# Altium PCB PCB1.PcbDoc
Units mil, origin at the board's own origin, x right, y up, seen from the top; angles counter-clockwise.
Board outline 2637.8 x 3852.11 mil, 4 copper layers (Top Layer, +5V, GND, Bottom Layer), stack 30.634 mil thick; 83 components, 53 nets, 285 pads, 159 vias.
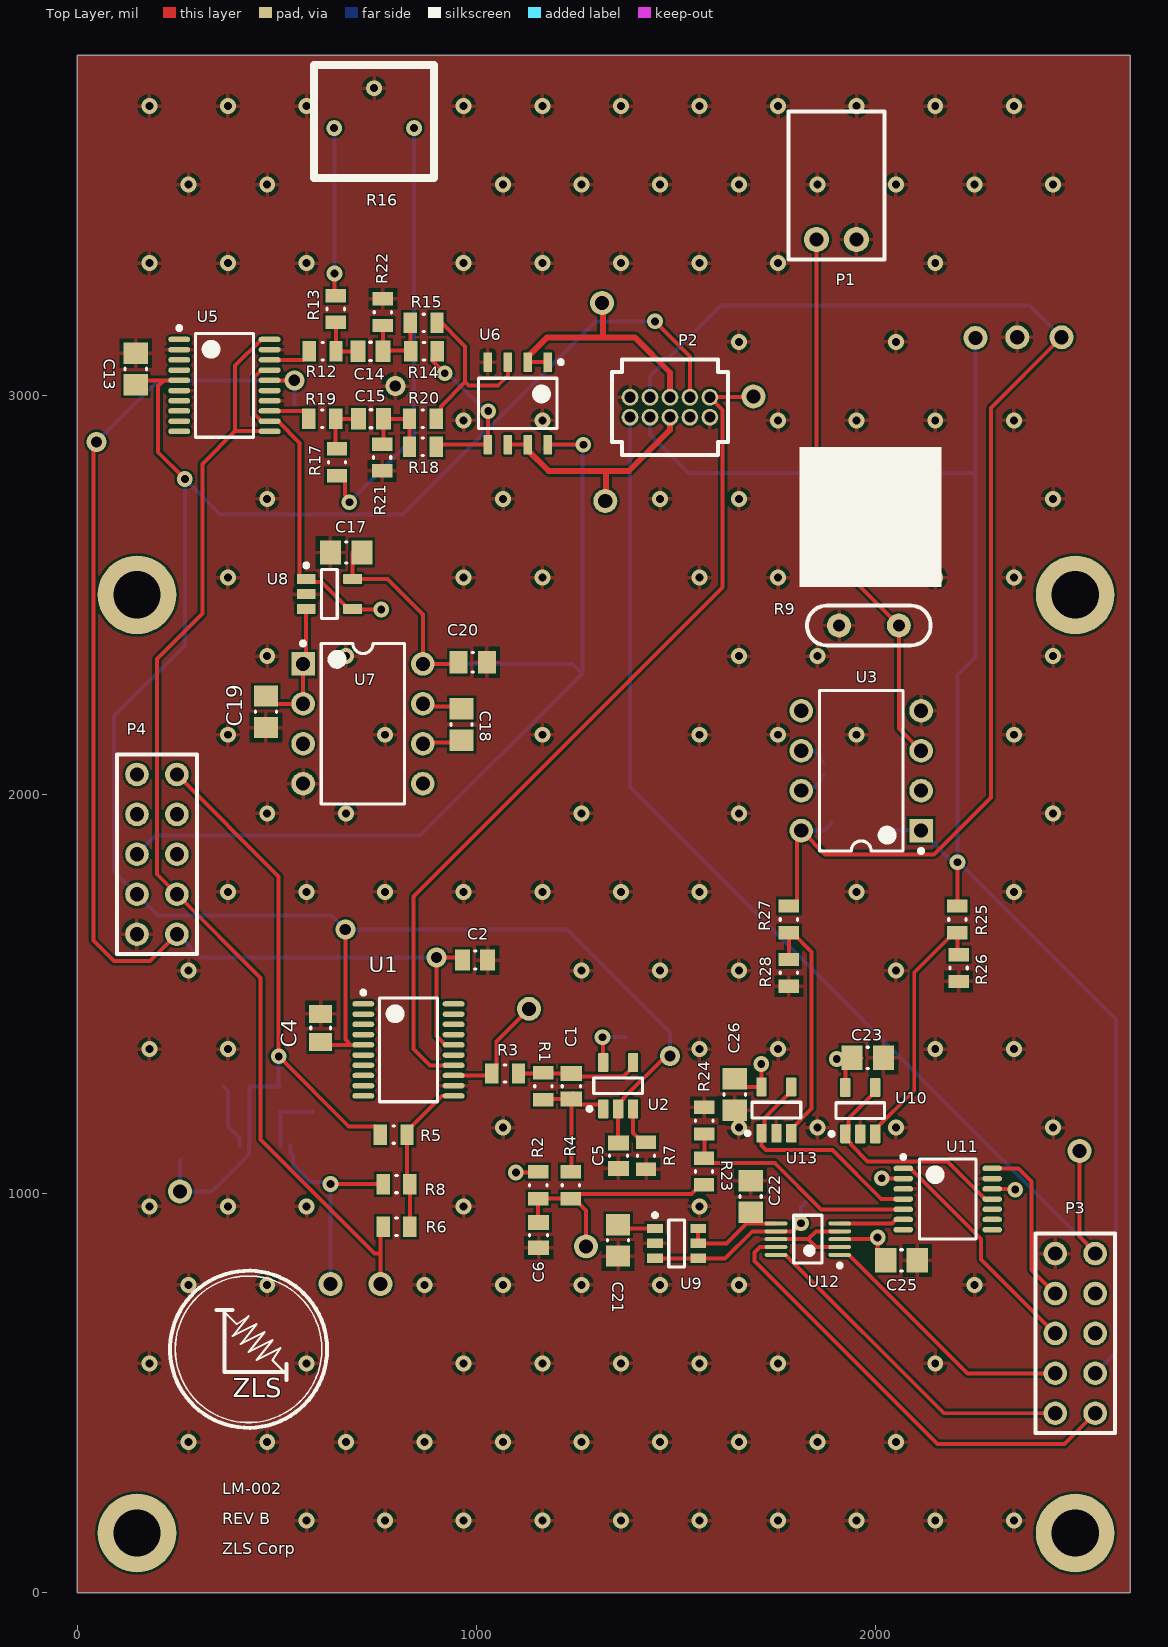
[diagram p0: Top Layer view]
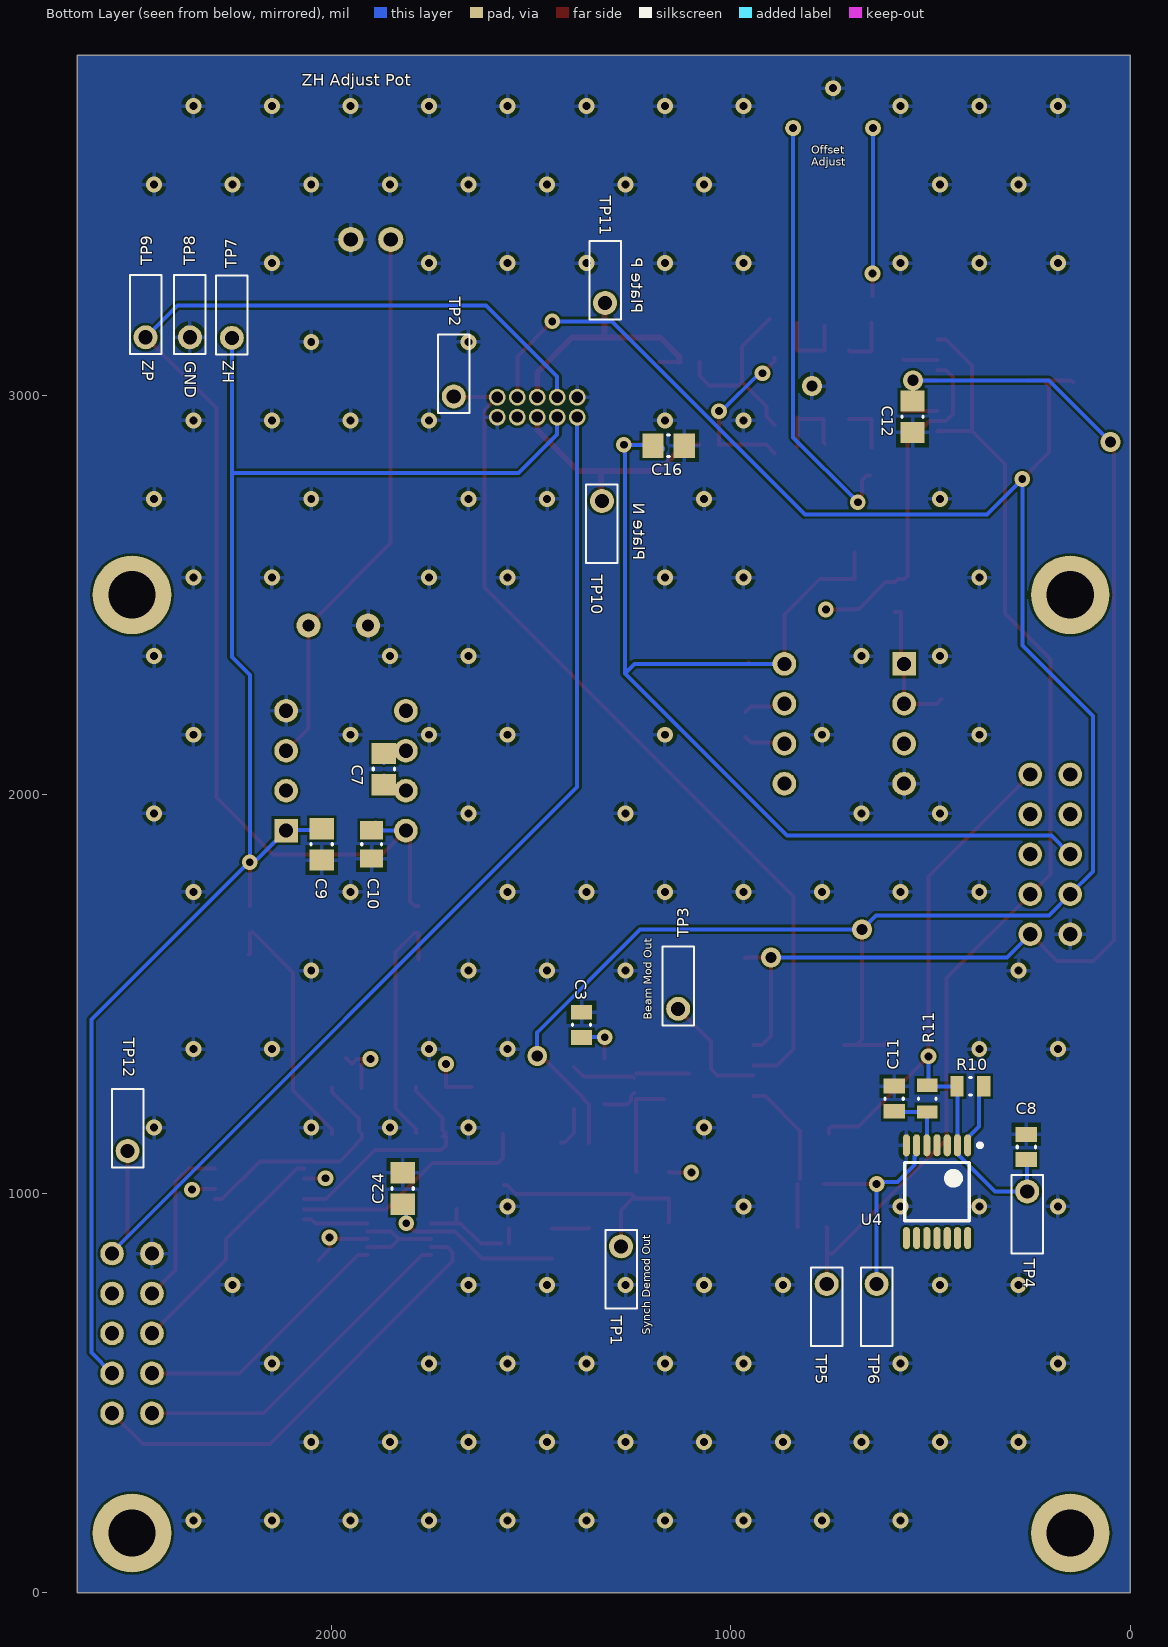
[diagram p1: Bottom Layer view, seen from below]
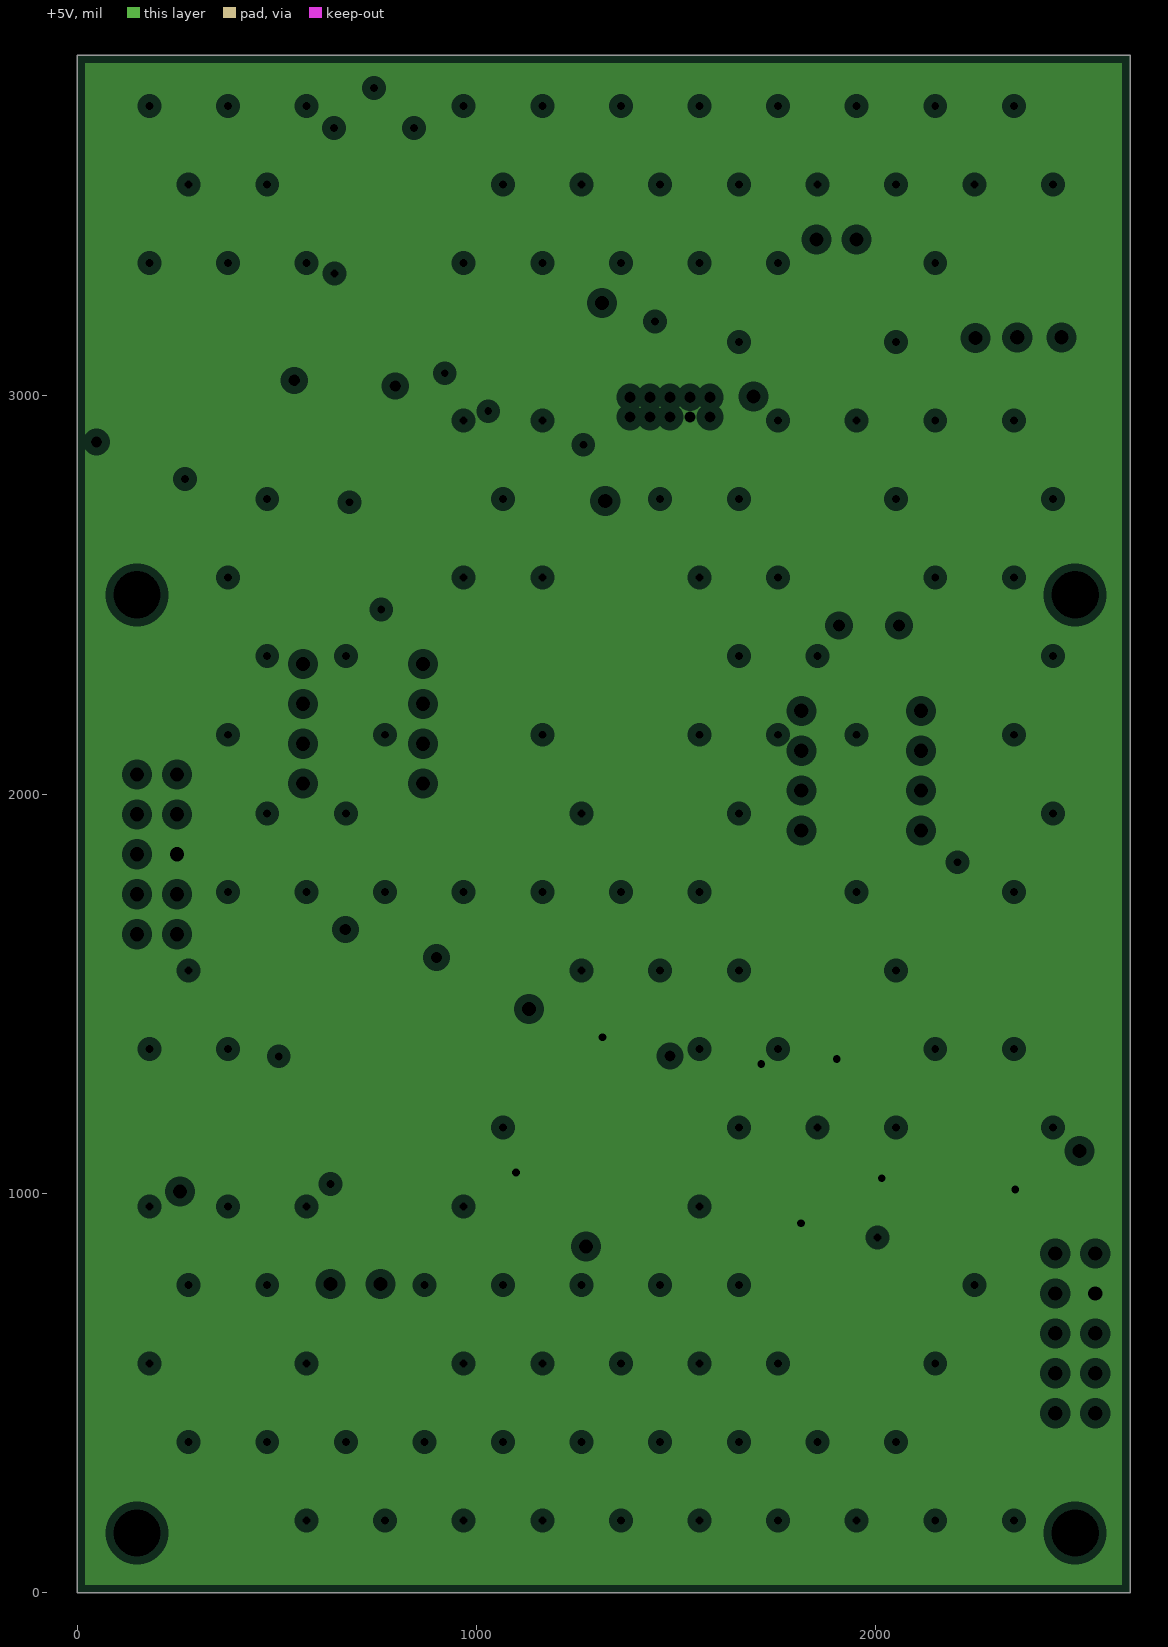
[diagram p2: +5V, clearances drawn from the general rule]
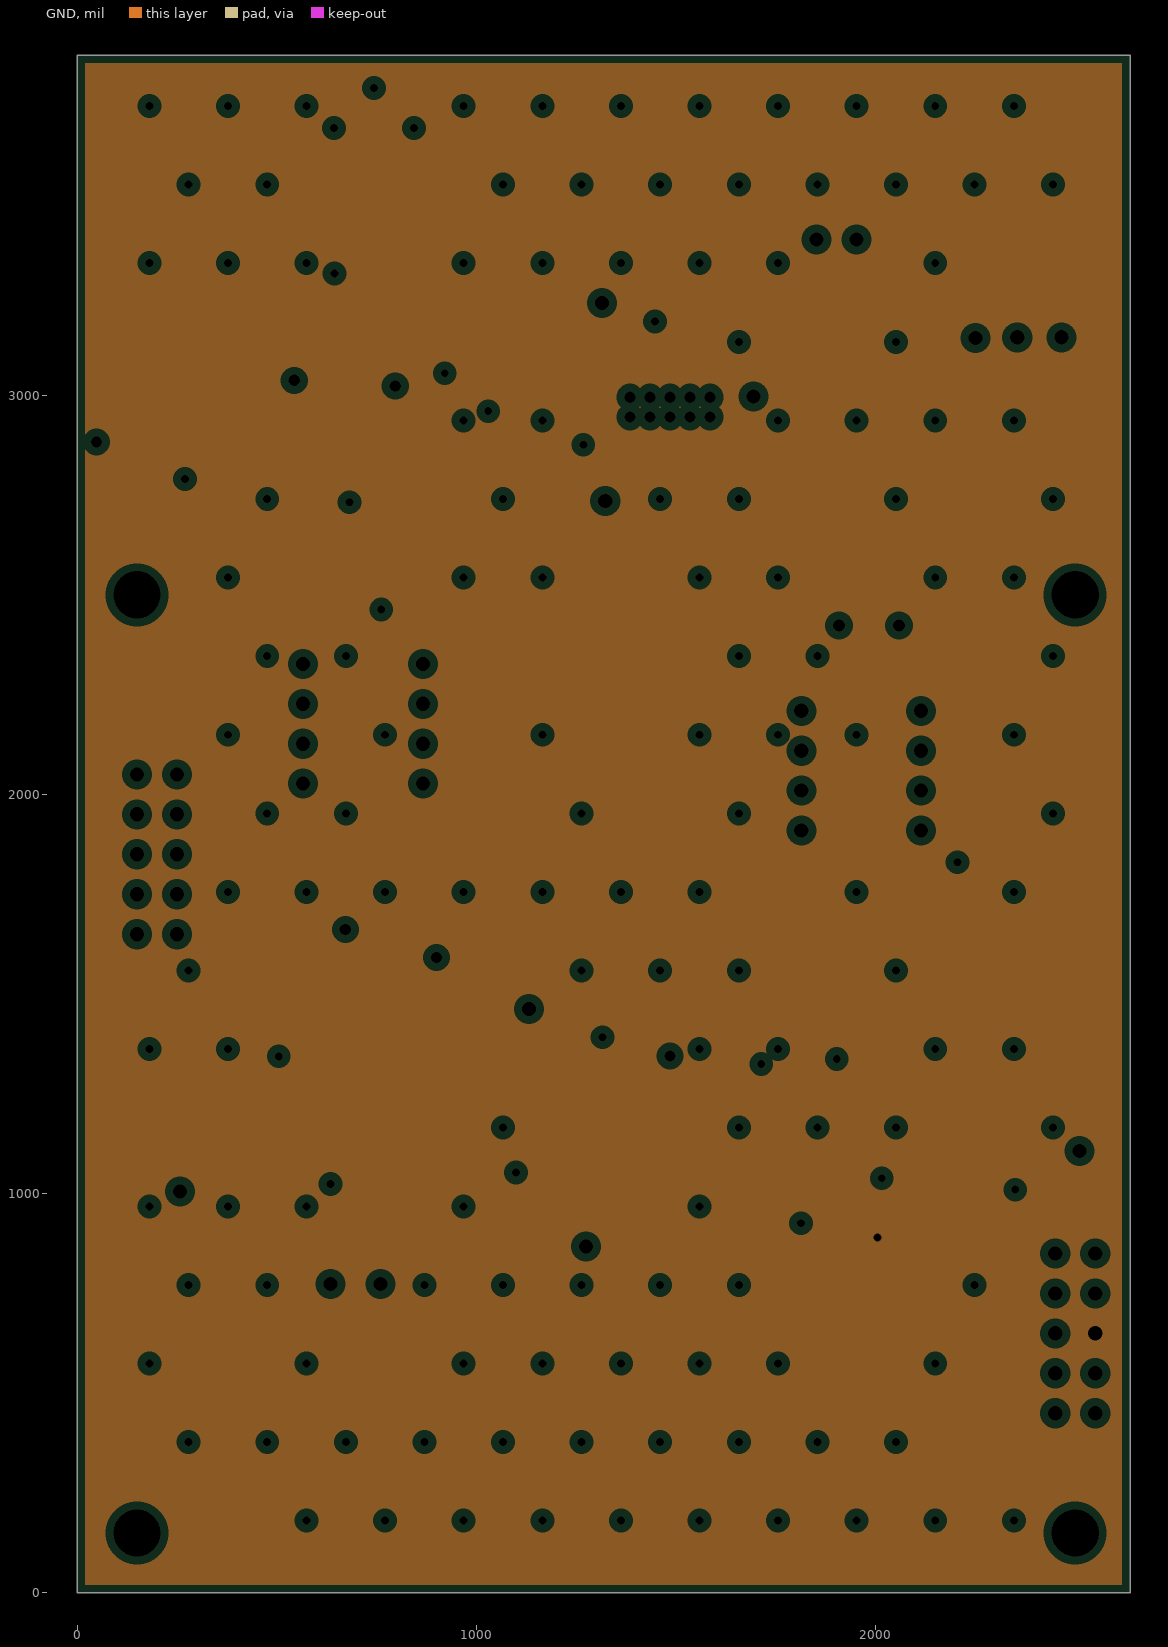
[diagram p3: GND, clearances drawn from the general rule]

## Layer stack, top to bottom
Top Solder: solder mask 0.4, Solder Resist, Dk 3.5
Top Layer: signal copper 1.4
Dielectric 1: core 10, FR-4, Dk 4.2
+5V: plane copper 1.417, net +5
Dielectric 4: prepreg 5, Dk 4.2
GND: plane copper 1.417, net +3.3
Dielectric 3: core 10, Dk 4.2
Bottom Layer: signal copper 1.4
Bottom Solder: solder mask 0.4, Solder Resist, Dk 3.5

## Board outline
0,0 2637.8,0 2637.79,3852.11 0,3852.11

## Design rules (kind name [scope] priority, off if disabled: settings)
Clearance [All] p1: gap=5.91 ignorepadtopadclearanceinfootprint=TRUE except(1.57: SMDPad-SMDPad; 3.94: SMDPad-THPad)
DiffPairsRouting DiffPair_DiffPairsRouting [InDifferentialPair ('PLATE')] p1: maxlimit=10 minlimit=10 mostfreqgap=10 toplayer_minwidth=15 toplayer_maxwidth=15 toplayer_prefwidth=15 bottomlayer_minwidth=15 bottomlayer_maxwidth=15 bottomlayer_prefwidth=15 maxuncoupledlength=500
DiffPairsRouting [All] p2: maxlimit=10 minlimit=10 mostfreqgap=10 toplayer_minwidth=15 toplayer_maxwidth=15 toplayer_prefwidth=15 bottomlayer_minwidth=15 bottomlayer_maxwidth=15 bottomlayer_prefwidth=15 maxuncoupledlength=500
HoleSize [All] p1: absolutevalues=TRUE maxlimit=393.7 minlimit=2.99 maxpercent=80.000 minpercent=20.000
HoleToHoleClearance [All] p1: gap=4.72 allowstackedmicrovias=TRUE
MatchedLengths DiffPair_MatchedLengths [InDifferentialPair ('PLATE')] p1: tolerance=100 checknetsindiffpair=FALSE checkdiffpairvsdiffpair=TRUE checkxsignals=TRUE checkothers=TRUE
MinimumSolderMaskSliver [All] p1: minsoldermaskwidth=0.98
PlaneClearance [All] p1: clearance=20
PlaneConnect [All] p1: planeconnectstyle=Relief reliefexpansion=20 reliefentries=4 reliefconductorwidth=10 reliefairgap=10
PolygonConnect [All] p1: connectstyle=Relief reliefconductorwidth=10 reliefentries=4 polygonreliefangle="90 Angle" airgapwidth=10
RoutingVias [All] p1: holewidth=28 width=50 viastyle="Through Hole" minholewidth=5 minwidth=35.43 maxholewidth=55.12 maxwidth=100
SilkToSilkClearance [All] p1: silktosilkclearance=4.72
SilkToSolderMaskClearance [IsPad] p1: minsilkscreentomaskgap=4.72 clearancetoexposedcopper=TRUE
SolderMaskExpansion [All] p1: expansion=4
Width [All] p1: maxlimit=10 minlimit=3.94 preferedwidth=10
22 further rules are at their usual default settings.

## Classes and differential pairs
component class Sheet2: C21 C22 C23 C24 C25 C26 R23 R24 R25 R26 R27 R28 U9 U10 U11 U12 U13
component class Sheet1: 19.685mil C1 C2 C3 C4 C5 C6 C7 C8 C9 C10 C11 C12 C13 C14 C15 C16 C17 C18 C19 C20 P1 P2 P3 P4 R1 R2 R3 R4 R5 R6 R7 R8 R9 R10 R11 R12 R13 R14 R15 R16 R17 R18 R19 R20 R21 R22 TP1 TP2 TP3 TP4 TP5 TP6 TP7 TP8 TP9 TP10 TP11 TP12 U1 U2 U3 U4 U5 U6 U7 U8
differential pair PLATE: +PLATE_P -PLATE_N

## Components (designator, comment, footprint, x,y, rotation, side; value= is the part's Value field where it differs from the comment)
C1 "470nF" CAPC0805(2012)75_L 1238.11,1269.11 r270 top value=.47uF
C2 ".1uF" CAPC0805(2012)75_L 997.11,1585.11 r180 top
C3 ".1uF" CAPC0805(2012)75_L 1374.11,1423.11 r90 bottom
C4 "CAP CER 0.1UF 25V X7R 0805" CAPC0805(2012)145_N 610.11,1415.11 r90 top
C5 ".1uF" CAPC0805(2012)75_L 1356.11,1095.11 r270 top
C6 "22uF" CAPC0805(2012)75_L 1156.11,896.11 r90 top
C7 ".1uF" CAPC0805(2012)75_M 1869.13,2063.57 r90 bottom
C8 ".001uF" CAPC0805(2012)75_L 260.11,1117.11 r270 bottom
C9 ".1uF" CAPC0805(2012)75_M 2025,1875 r90 bottom
C10 "Multilayer Ceramic Capacitors MLCC - SMD/SMT 0.01uF 50volts 10% X7R" CAPC0805(2012)145_N 1900,1875 r270 bottom
C11 "470Pf" CAPC0805(2012)75_L 591.11,1238.11 r270 bottom
C12 ".1uF" CAPC0805(2012)75_M 545.11,2946.11 r90 bottom
C13 ".1uF" CAPC0805(2012)75_M 147.11,3065.91 r270 top
C14 "CAP CER 1UF 25V X7R 0805" CAPC0805(2012)155_L 735.11,3110.11 r180 top
C15 "CAP CER 1UF 25V X7R 0805" CAPC0805(2012)155_L 736.11,2941.11 r180 top
C16 ".1uF" CAPC0805(2012)75_M 1156.13,2873.57 r0 bottom
C17 ".1uF" CAPC0805(2012)75_M 674.11,2606.11 r0 top
C18 ".1uF" CAPC0805(2012)75_M 963.11,2175.11 r270 top
C19 ".1uF" CAPC0805(2012)75_M 473.11,2207.11 r90 top
C20 "Multilayer Ceramic Capacitors MLCC - SMD/SMT 0.01uF 50volts 10% X7R" CAPC0805(2012)145_N 991.11,2331.11 r0 top
C21 ".1uF" CAPC0805(2012)75_M 1355.11,883.11 r270 top
C22 ".1uF" CAPC0805(2012)75_M 1687.11,993.11 r270 top
C23 ".1uF" CAPC0805(2012)75_M 1980.36,1340.11 r180 top
C24 ".1uF" CAPC0805(2012)75_M 1822.11,1013.11 r270 bottom
C25 ".1uF" CAPC0805(2012)75_M 2065.11,833.11 r180 top
C26 ".1uF" CAPC0805(2012)75_M 1647.39,1248.57 r90 top
P1 "SSW-102-02-G-S-RA" SSW-102-02-G-S-RA 1952.11,3390.11 r180 top
P2 "FTSH-105-01-F-DV-K" FTSH-105-01-XXX-D-K 1485.11,2970.11 r180 top
P3 "TLW-105-05-G-D" TLW-105-05-G-D 2450.11,850.11 r270 top
P4 "TLW-105-05-G-D" TLW-105-05-G-D 150.11,2050.11 r270 top
R1 "3..k" RESC0805(2012)_L 1168.11,1269.11 r90 top value=300k
R2 "100k" RESC0805(2012)_L 1155.11,1021.11 r90 top
R3 "18.2k" RESC0805(2012)_L 1072.11,1301.11 r180 top
R4 "511k" RESC0805(2012)_L 1237.11,1021.11 r90 top
R5 "0" RESC0805(2012)_L 793.11,1148.11 r0 top
R6 "DNP" RESC0805(2012)_L 800.11,917.11 r0 top value=0
R7 "33k" RESC0805(2012)_L 1425.11,1095.11 r90 top
R8 "DNP" RESC0805(2012)_L 800.11,1024.11 r0 top value=0
R9 "TBD" VH102K 2058.34,2423.26 r180 top
R10 "43.2K" RESC0805(2012)_L 400.11,1269.11 r0 bottom
R11 "10K" RESC0805(2012)_L 508.11,1238.11 r90 bottom
R12 "3.9k" RESC0805(2012)_L 615.11,3110.11 r180 top
R13 "7.5k" RESC0805(2012)_L 648.11,3216.11 r270 top
R14 "0" RESC0805(2012)_L 869.11,3110.11 r180 top
R15 "DNP" RESC0805(2012)_L 868.11,3181.11 r180 top value=0
R16 "TRIMMER 5K OHM 0.25W PC PIN" "TRIMMER 2.54" 644.11,3669.11 r0 top
R17 "7.5k" RESC0805(2012)_L 651.11,2832.11 r270 top
R18 "DNP" RESC0805(2012)_L 866.11,2871.11 r180 top value=0
R19 "3.9k" RESC0805(2012)_L 614.11,2941.09 r0 top
R20 "0" RESC0805(2012)_L 866.11,2941.09 r180 top
R21 "1M" RESC0805(2012)_L 764.11,2844.11 r90 top
R22 "1M" RESC0805(2012)_L 766.11,3208.11 r270 top
R23 "10k" RESC0805(2012)_L 1570.36,1055.64 r270 top
R24 "10k" RESC0805(2012)_L 1571.11,1183.11 r270 top
R25 "100k" RESC0805(2012)_L 2205.11,1687.11 r90 top
R26 "10k" RESC0805(2012)_L 2208.11,1565.11 r90 top
R27 "100k" RESC0805(2012)_L 1783.11,1687.11 r90 top
R28 "10k" RESC0805(2012)_L 1783.11,1553.11 r90 top
TP1 "TP-TH-C-152-H90" TP-TH-C-152-H90 1275.11,868.11 r270 bottom
TP2 "TP-TH-C-152-H90" TP-TH-C-152-H90 1694.11,2997.11 r90 bottom
TP3 "TP-TH-C-152-H90" TP-TH-C-152-H90 1132.11,1463.11 r90 bottom
TP4 "TP-TH-C-152-H90" TP-TH-C-152-H90 257.76,1005.86 r270 bottom
TP5 "TP-TH-C-152-H90" TP-TH-C-152-H90 760.11,774.11 r270 bottom
TP6 "TP-TH-C-152-H90" TP-TH-C-152-H90 634.91,774.11 r270 bottom
TP7 "TP-TH-C-152-H90" TP-TH-C-152-H90 2250.11,3143.81 r90 bottom
TP8 "TP-TH-C-152-H90" TP-TH-C-152-H90 2355.11,3145.11 r90 bottom
TP9 "TP-TH-C-152-H90" TP-TH-C-152-H90 2466.11,3145.11 r90 bottom
TP10 "TP-TH-C-152-H90" TP-TH-C-152-H90 1323.11,2735.11 r270 bottom
TP11 "TP-TH-C-152-H90" TP-TH-C-152-H90 1315.11,3231.11 r90 bottom
TP12 "TP-TH-C-152-H90" TP-TH-C-152-H90 2511.11,1107.11 r90 bottom
U1 "MAX333CWP+" TSOP65P640X90-20N 830.11,1360.11 r0 top
U2 "OPA188AIDBVR" DBV0005A_M 1355.39,1270.57 r90 top
U3 "AD584KNZ" ADI-N-8 1964.13,2059.57 r180 top
U4 "MC14584BDTR2G" MC14584BDTR2G 483.7,1005.11 r270 bottom
U5 "MAX333CWP+" TSOP65P640X90-20N 369.13,3024.57 r0 top
U6 "OPA2188AIDR" D0008A_L 1104.13,2979.57 r270 top
U7 "AD584KNZ" ADI-N-8 716.11,2177.11 r0 top
U8 "OPA188AIDBVR" DBV0005A_M 632.11,2502.11 r0 top
U9 "MAX6070AAUT41+T" SOT95P280X445-6N 1501.71,875.39 r0 top
U10 "OPA188AIDBVR" DBV0005A_M 1961.79,1208 r90 top
U11 "ADG1204YRUZ-REEL7" ADI-RU-14_L 2180.84,986.61 r0 top
U12 "MAX11100EUB+T" U10+2_L 1830.57,886.14 r180 top
U13 "OPA188AIDBVR" DBV0005A_M 1751.62,1209.57 r90 top

## Footprints (in the part's own frame and the unit in brackets; to place one, negate y for a bottom-side part, rotate by r counter-clockwise, add the part's x,y. Pads: shape width x height; smd on the part's side, far side on the other; paste and mask are expansions set on the pad)
ADI-N-8 [mm] "DIP, 8-Leads, Body 9.59x6.6mm, Pitch 2.54mm"
  rect 1.5x1.5 hole 0.9: 1(-3.81,3.81)
  round 1.5 hole 0.9: 2(-3.81,1.27) 3(-3.81,-1.27) 4(-3.81,-3.81) 5(3.81,-3.81) 6(3.81,-1.27) 7(3.81,1.27) 8(3.81,3.81)
  silkscreen extent -3.94,-5.1 2.65,5.23, body extent -3.95,-5.07 3.95,5.07, height 5.33
ADI-RU-14_L [mm] "SOP, 14-Leads, Body 5x4.4mm, Pitch 0.65mm, IPC High Density"
  oval 1.25x0.35 smd: 1(-2.825,1.95) 2(-2.825,1.3) 3(-2.825,0.65) 4(-2.825,0) 5(-2.825,-0.65) 6(-2.825,-1.3) 7(-2.825,-1.95) 8(2.825,-1.95) 9(2.825,-1.3) 10(2.825,-0.65) 11(2.825,0) 12(2.825,0.65) 13(2.825,1.3) 14(2.825,1.95)
  silkscreen extent -2.95,-2.55 1.8,2.8, body extent -2.25,-2.55 2.25,2.55, height 1.2
CAPC0805(2012)75_L [mm] "Chip Capacitor, Body 2.0x1.2mm, Height 0.75mm, IPC High Density"
  rect 0.95x1.35 smd: 1(-0.8,0) 2(0.8,0)
  silkscreen extent -0.05,-0.58 0.05,0.58, body extent -1.1,-0.72 1.1,0.72, height 0.75
CAPC0805(2012)75_M [mm] "Chip Capacitor, Body 2.0x1.2mm, Height 0.75mm, IPC Low Density"
  rect 1.35x1.55 smd: 1(-1,0) 2(1,0)
  silkscreen extent -0.05,-0.67 0.05,0.67, body extent -1.1,-0.72 1.1,0.72, height 0.75
CAPC0805(2012)145_N [mm] "Chip Capacitor, Body 2.0x1.2mm, Height 1.45mm, IPC Medium Density"
  rect 1.15x1.45 smd: 1(-0.9,0) 2(0.9,0)
  silkscreen extent -0.05,-0.62 0.05,0.62, body extent -1.1,-0.72 1.1,0.73, height 1.45
CAPC0805(2012)155_L [mm] "Chip Capacitor, Body 2.0x1.2mm, Height 1.55mm, IPC High Density"
  rect 0.95x1.35 smd: 1(-0.8,0) 2(0.8,0)
  silkscreen extent -0.05,-0.57 0.05,0.57, body extent -1.1,-0.72 1.1,0.72, height 1.55
D0008A_L [mm] "SOIC, 8-Leads, Body 5x4mm, Pitch 1.27mm, IPC High Density"
  rrect18% 1.25x0.55 smd: 1(-2.625,1.905) 2(-2.625,0.635) 3(-2.625,-0.635) 4(-2.625,-1.905) 5(2.625,-1.905) 6(2.625,-0.635) 7(2.625,0.635) 8(2.625,1.905)
  silkscreen extent -2.75,-2.5 1.6,2.86, body extent -3,-2.45 3,2.45, height 1.63
DBV0005A_M [mm] "SOT23, 5-Leads, Body 3.05x1.75mm, Pitch 0.95mm, IPC Low Density"
  rrect15% 1.2x0.65 smd: 1(-1.475,0.95) 2(-1.475,0) 3(-1.475,-0.95) 4(1.475,-0.95) 5(1.475,0.95)
  silkscreen extent -1.6,-1.55 0.5,1.95, body extent -1.42,-1.46 1.42,1.46, height 1.08
FTSH-105-01-XXX-D-K [mil]
  round 42 hole 28 mask+3: 1(-100,-25) 2(-100,25) 3(-50,-25) 4(-50,25) 5(0,-25) 6(0,25) 7(50,-25) 8(50,25) 9(100,-25) 10(100,25)
  silkscreen extent -145,-120 145,120
MC14584BDTR2G [mm]
  oval 1.4x0.45 smd: 1(-2.95,1.95) 2(-2.95,1.3) 3(-2.95,0.65) 4(-2.95,0) 5(-2.95,-0.65) 6(-2.95,-1.3) 7(-2.95,-1.95) 8(2.95,-1.95) 9(2.95,-1.3) 10(2.95,-0.65) 11(2.95,0) 12(2.95,0.65) 13(2.95,1.3) 14(2.95,1.95)
  silkscreen extent -3.07,-2.05 1.85,2.85, body extent -3.2,-2.07 3.2,2.07, height 1.2
RESC0805(2012)_L [mm] "Chip Resistor, Body 2.0x1.3mm, IPC High Density"
  rect 0.85x1.3 smd: 1(-0.85,0) 2(0.85,0)
  silkscreen extent -0.05,-0.55 0.05,0.55, body extent -1.1,-0.67 1.1,0.68, height 0.7
SOT95P280X445-6N [mm] "SOT23, 6-Leads, Body 2.90x2.80mm, Pitch 0.95mm, IPC Medium Density"
  rect 1x0.6 smd: 1(-1.375,0.95) 2(-1.375,0) 3(-1.375,-0.95) 4(1.375,-0.95) 5(1.375,0) 6(1.375,0.95)
  silkscreen extent -1.5,-1.5 0.5,1.92, body extent -1.5,-1.5 1.5,1.5, height 4.45
SSW-102-02-G-S-RA [mm]
  round 1.6 hole 0.91: 1(0,0) 2(2.54,0)
  silkscreen extent -1.78,-8.13 4.32,1.27, body extent -1.52,-8.06 4.06,0.44, height 3.21
TLW-105-05-G-D [mm]
  round 1.5 hole 0.91: 1(0,0) 2(0,2.54) 3(2.54,0) 4(2.54,2.54) 5(5.08,0) 6(5.08,2.54) 7(7.62,0) 8(7.62,2.54) 9(10.16,0) 10(10.16,2.54)
  silkscreen extent -1.27,-1.27 11.43,3.81, body extent -1.27,-1.31 11.43,3.72, height 6.35
TP-TH-C-152-H90 [mil] "Test Point, Through Hole, Hole Size 0.9mm, PCB Mount with Silkscreen Box"
  round 60 hole 35.43: 1(0,0)
  silkscreen extent -41,-39 156,39
"TRIMMER 2.54" [mil]
  round 40 hole 20: 1(0,0) 2(100,100) 3(200,0)
  silkscreen extent -50,-125 250,158, body extent -60,-126 260,200, height 175
TSOP65P640X90-20N [mm] "TSOP, 20-Leads, Body 6.50x4.40mm, Pitch 0.65mm, IPC Medium Density"
  oval 1.4x0.35 smd: 1(-2.875,2.925) 2(-2.875,2.275) 3(-2.875,1.625) 4(-2.875,0.975) 5(-2.875,0.325) 6(-2.875,-0.325) 7(-2.875,-0.975) 8(-2.875,-1.625) 9(-2.875,-2.275) 10(-2.875,-2.925) 11(2.875,-2.925) 12(2.875,-2.275) 13(2.875,-1.625) 14(2.875,-0.975) 15(2.875,-0.325) 16(2.875,0.325) 17(2.875,0.975) 18(2.875,1.625) 19(2.875,2.275) 20(2.875,2.925)
  silkscreen extent -3,-3.3 1.85,3.77, body extent -2.25,-3.3 2.25,3.3, height 0.9
U10+2_L [mm] "TSSOP, 10-Leads, Body 3x3mm, Pitch 0.5mm, IPC High Density"
  oval 1.45x0.25 smd: 1(-2.025,1) 2(-2.025,0.5) 3(-2.025,0) 4(-2.025,-0.5) 5(-2.025,-1) 6(2.025,-1) 7(2.025,-0.5) 8(2.025,0) 9(2.025,0.5) 10(2.025,1)
  silkscreen extent -2.15,-1.53 0.9,1.8, body extent -1.55,-1.55 1.55,1.55, height 1.1
VH102K [mil] "Hermetically Sealed High Precision Resistor"
  round 60 hole 30: 1(0,0) 2(149.61,0)
  silkscreen extent -80,-50 230,50

## Part data
C1 C2 C3 C5 C6 C8 C11: library part CMP-1036-02117-1, "CAP 150pF 16V ±10% 0805 (2012 Metric) Thickness 0.75mm SMD", Case-EIA=0805, Case-Metric=2012, Rated Voltage="16 V", Tolerance=±10%, Max Thickness="0.75 mm", Technology=SMT
C4: library part CMP-1036-04795-1, Capacitance=0.1µF, Manufacturer="Murata Electronics North America", Manufacturer Part Number=GRM21BR71E104KA01L, Operating Temperature="-55°C ~ 125°C", Package / Case="0805 (2012 Metric)", Ratings=-, Supplier Part Number 1=490-1673-6-ND, Temperature Coefficient=X7R, Tolerance=±10%, Voltage - Rated=25V, Applications="General Purpose", Category=Capacitors, ComponentLink1Description=http://www.murata.com/~/media/webrenewal/support/library/catalog/products/capacitor/mlcc/c02e.ashx, ComponentLink1URL=http://www.murata.com/~/media/webrenewal/support/library/catalog/products/capacitor/mlcc/c02e.ashx, Features=-, Height - Seated (Max)=-, Lead Spacing=-, Lead Style=-, Mounting Type="Surface Mount, MLCC", Packaging=Digi-Reel®, Part Status=Active, Pricing 1="1=0.2, 10=0.145, 100=0.0683, 500=0.04788, 1000=0.03964 (USD)", RoHS="RoHS Compliant", Size / Dimension="0.079\" L x 0.049\" W (2.00mm x 1.25mm)", Stock 1=891652, Supplier 1=Digi-Key, Thickness (Max)="0.053\" (1.35mm)"
C7 C9 C12 C13 C16 C17 C18 C19 C21 C22 C23 C24 C25 C26: library part CMP-1036-01414-1, "CAP 33pF 25V ±2% 0805 (2012 Metric) Thickness 0.75mm SMD", Case-EIA=0805, Case-Metric=2012, Rated Voltage="25 V", Tolerance=±2%, Max Thickness="0.75 mm", Technology=SMT
C10 C20: library part CMP-1036-04795-1, Capacitance=10nF, Case/Package=0805, Case Code (Metric)=2012, Dielectric=X7R, Dielectric Material=Ceramic, Manufacturer=Kemet, Manufacturer Part Number=C0805C103K5RACAUTO, Max Operating Temperature=125°C, Min Operating Temperature=-55°C, Package Quantity=1, Supplier Part Number 1=399-6924-1-ND, Tolerance=10%, Voltage Rating=50V, Case Code (Imperial)=0805, ComponentLink1Description=https://datasheet.ciiva.com/22700/1693454-22700519.pdf, ComponentLink1URL=https://datasheet.ciiva.com/22700/1693454-22700519.pdf, ComponentLink2Description=https://datasheet.ciiva.com/7842/1693454-7842175.pdf, ComponentLink2URL=https://datasheet.ciiva.com/7842/1693454-7842175.pdf, Contact Plating=Tin, Depth=1.25mm, Height=0.78mm, Length=2mm, Mount="Surface Mount", Packaging="Tape and Reel", Pricing 1="1=0.12, 10=0.087, 100=0.041, 500=0.0287, 1000=0.0238 (USD)", Radiation Hardening=No, REACH SVHC="No SVHC", Stock 1=63236, Supplier 1=Digi-Key, Termination=SMD/SMT, Thickness=0.035inch, Voltage Rating (DC)=50V, Width=0.049inch
C14 C15: library part CMP-1036-04882-1, Capacitance=1µF, Manufacturer="Murata Electronics North America", Manufacturer Part Number=GRM21BR71E105KA99L, Operating Temperature="-55°C ~ 125°C", Package / Case="0805 (2012 Metric)", Ratings=-, Supplier Part Number 1=490-6484-6-ND, Temperature Coefficient=X7R, Tolerance=±10%, Voltage - Rated=25V, Applications="General Purpose", Category=Capacitors, ComponentLink1Description=http://www.murata.com/~/media/webrenewal/support/library/catalog/products/capacitor/mlcc/c02e.ashx, ComponentLink1URL=http://www.murata.com/~/media/webrenewal/support/library/catalog/products/capacitor/mlcc/c02e.ashx, Features=-, Height - Seated (Max)=-, Lead Spacing=-, Lead Style=-, Mounting Type="Surface Mount, MLCC", Packaging=Digi-Reel®, Part Status=Active, Pricing 1="1=0.14, 10=0.099, 100=0.0468, 500=0.0328, 1000=0.02715 (USD)", RoHS="RoHS Compliant", Size / Dimension="0.079\" L x 0.049\" W (2.00mm x 1.25mm)", Stock 1=295074, Supplier 1=Digi-Key, Thickness (Max)="0.053\" (1.35mm)"
P1: Supplier Part Number 1=SAM1225-02-ND, Supplier 1=Digi-Key
P2: library part FTSH-105-01-XXX-D-K, "TERMINAL STRIP, .050\"(1.27mm) PITCH, 10 PINS, KEYING OPTION.", Manufacturer=SAMTEC, CREATED="September 26, 2016 - Wendy Xin", PCB DECAL=FTSH-105-01-F-DV-K
P3 P4: Current Rating="5.2A per Contact", Insulation Color=Black, Manufacturer="Samtec Inc.", Manufacturer Part Number=MTLW-105-05-G-D-170, Material Flammability Rating="UL94 V-0", Operating Temperature="-55°C ~ 125°C", Supplier Part Number 1=MTLW-105-05-G-D-170-ND, Voltage Rating=-, Applications=-, Category="Connectors, Interconnects", ComponentLink1Description=http://suddendocs.samtec.com/prints/mtlw-1xx-xx-xx-x-xxx-xx-xx-mkt1.pdf, ComponentLink1URL=http://suddendocs.samtec.com/prints/mtlw-1xx-xx-xx-x-xxx-xx-xx-mkt1.pdf, Connector Type=Header, Contact Finish - Mating=Gold, Contact Finish - Post=Gold, Contact Finish Thickness - Mating="10µin (0.25µm)", Contact Finish Thickness - Post="3µin (0.08µm)", Contact Length - Mating="0.170\" (4.32mm)", Contact Length - Post="0.105\" (2.67mm)", Contact Material="Phosphor Bronze", Contact Shape=Square, Contact Type="Male Pin", Fastening Type=Push-Pull, Features=-, Ingress Protection=-, Insulation Height="0.060\" (1.52mm)", Insulation Material="Liquid Crystal Polymer (LCP)", Mated Stacking Heights=-, Mounting Type="Through Hole", Number of Positions=10, Number of Positions Loaded=All, Number of Rows=2, Overall Contact Length="0.335\" (8.51mm)", Packaging=Tube, Part Status=Active, Pitch - Mating="0.100\" (2.54mm)", Pricing 1="1=1.79 (USD)", RoHS="RoHS Compliant", Row Spacing - Mating="0.100\" (2.54mm)", Shrouding=Unshrouded, Stock 1=0, Style="Board to Board or Cable", Supplier 1=Digi-Key, Termination=Solder
R1 R2 R3 R4 R5 R6 R7 R8 R10 R11 R12 R13 R14 R15 R17 R18 R19 R20 R21 R22 R23 R24 R25 R26 R27 R28: library part CMP-1013-00215-1, "2R55 0.125W 1% 0805 (2012 Metric)  SMD", Case-EIA=0805, Case-Metric=2012, Power="0.125 W", Tolerance="1 %", Technology=SMT
R9: library part CMP-1013-00393-1
R16: library part Trimmer, Manufacturer="Vishay Foil Resistors (Division of Vishay Precision Group)", Manufacturer Part Number=Y00535K00000J0L, Power (Watts)="0.25W, 1/4W", Resistance (Ohms)=5k, Resistive Material="Metal Foil", Supplier Part Number 1=804-1020-ND, Temperature Coefficient=±10ppm/°C, Tolerance=±5%, Adjustment Type="Side Adjustment", Category="Potentiometers, Variable Resistors", ComponentLink1Description=http://www.vishaypg.com/docs/63053/1240.pdf, ComponentLink1URL=http://www.vishaypg.com/docs/63053/1240.pdf, Mounting Type="Through Hole", Number of Turns=21, Packaging=Bulk, Part Status=Active, Pricing 1="1=34.42, 10=32.265, 25=26.5292, 50=22.944, 100=22.227, 250=20.793, 500=19.2156 (USD)", RoHS="RoHS Compliant", Size / Dimension="Rectangular - 0.250\" x 0.175\" Face x 0.250\" L (6.35mm x 4.45mm x 6.35mm)", Stock 1=679, Supplier 1=Digi-Key, Termination Style="PC Pins"
TP1 TP2 TP3 TP4 TP5 TP6 TP7 TP8 TP9 TP10 TP11 TP12: library part CMP-0484-00003-2, "Test Point, Through Hole, Hole Size 0.9 mm, PCB Mount with Silkscreen Box", Manufacturer="No Vendor", PartNumber=TP-TH-C-152-H90
U1 U5: "IC SWITCH QUAD SPDT 20TSSOP", Case/Package=TSSOP, Dual Supply Voltage=15V, Manufacturer=Maxim, Manufacturer Part Number=MAX333AEUP+, Max Dual Supply Voltage=20V, Max Operating Temperature=85°C, Max Power Dissipation=559mW, Max Supply Current=250uA, Max Supply Voltage=30V, Min Dual Supply Voltage=4.5V, Min Operating Temperature=-40°C, Min Supply Voltage=10V, On-State Resistance=35R, Operating Supply Current=1uA, Package Quantity=74, Supplier Part Number 1=700-MAX333AEUP, ComponentLink1Description=https://datasheet.ciiva.com/2978/max333a-2978850.pdf, ComponentLink1URL=https://datasheet.ciiva.com/2978/max333a-2978850.pdf, ComponentLink2Description=https://datasheet.ciiva.com/30478/0900766b81253c85-30478260.pdf, ComponentLink2URL=https://datasheet.ciiva.com/30478/0900766b81253c85-30478260.pdf, ComponentLink3Description=https://datasheet.ciiva.com/1674/max333a-1674617.pdf, ComponentLink3URL=https://datasheet.ciiva.com/1674/max333a-1674617.pdf, ComponentLink4Description=https://datasheet.ciiva.com/26825/max333aeup-26825546.pdf, ComponentLink4URL=https://datasheet.ciiva.com/26825/max333aeup-26825546.pdf, Height=0.95mm, Lead Free="Lead Free", Length=6.6mm, Number of Bits=4, Number of Channels=4, Number of Pins=20, Packaging=Rail/Tube, Pricing 1="1=6.77, 10=6.43, 50=5.8, 100=5.8, 1000=5.62, 10000=5.62 (USD)", Radiation Hardening=No, REACH SVHC=Unknown, Stock 1=664, Supplier 1=Mouser, Supply Type=Single,Dual, Throw Configuration=SPDT, Turn-Off Delay Time=145ns, Turn-On Delay Time=175ns, Weight=0.006737oz, Width=4.5mm
U2 U8 U10 U13: library part CMP-0809-00005-2, "Precision, Low Noise, Rail-to-Rail Output, Zero-Drift Operational Amplifier, 4 to 36 V, -40 to 125 degC, 5-pin SOT23 (DBV5), Green (RoHS & no Sb/Br)", Manufacturer="Texas Instruments", Rating=Catalog, Total Supply Voltage(Max)(+5V is 5, +/-5V is 10)=36, Total Supply Voltage(Min)(+5V is 5, +/-5V is 10)=4, CMRR(Min)(dB)=120, Code_JEDEC=MO-178, ComponentLink1Description="Manufacturer URL", ComponentLink1URL=http://www.ti.com/, ComponentLink2Description=Datasheet, ComponentLink2URL=http://www.ti.com/lit/ds/symlink/opa188.pdf, ComponentLink3Description="Package Specification", ComponentLink3URL=http://www.ti.com/litv/pdf/mpds018i, DatasheetVersion=SBOS642A, Eco-Plan="Green (RoHS & no Sb/Br)", GBW(Typ)(MHz)=2, Iq per channel(Max)(mA)=0.51, Mounting Technology="Surface Mount", Number of Channels=1, Offset Drift(Typ)(uV/C)=0.03, PackageDescription="5-Pin Plastic Small Outline, Body 1.6 x 2.9 mm, Pitch 0.95 mm", PackageReference=DBV0005A, PackageVersion="4073253-4/K, 03/2006", PartNumber=OPA188AIDBVR, Slew Rate(Typ)(V/us)=0.8, SubFamily="Zero Drift Precision Amplifier"
U3 U7: library part CMP-0784-00054-1, "Pin Programmable, Precision Voltage Reference, + 2.5 / + 5 / + 7.5 / + 10 Prog V Output, 4.5 to 30 V Supply, Commercial, 8-pin DIP (N-8), Tube", Manufacturer="Analog Devices", Operating Temp Range="0 to 70 degC", Code_JEDEC=MS-001, ComponentLink1Description="Manufacturer URL", ComponentLink1URL=http://www.analog.com/en/index.html, ComponentLink2Description=Datasheet, ComponentLink2URL=http://www.analog.com/static/imported-files/data_sheets/AD584.pdf, ComponentLink3Description="Package Specification", ComponentLink3URL=http:/www.analog.com/static/imported-files/packages/PKG_PDF/PDIP(N)/N_8.pdf, ComponentLink4Description="URL Link1", ComponentLink4URL="Product URL:http://www.analog.com/en/special-linear-functions/voltage-references/ad584/products/product.html", DatasheetVersion="Rev. C", Max V Supply (V)=30, Min V Supply (V)=4.5, Mounting Technology="Through Hole", PackageDescription="8-Pin Plastic Dual In-Line Package, Row spacing 7.62 mm, Pitch 2.54 mm", PackageReference=N-8, PackageVersion="070606-A, 07/2006", Packing=Tube, PartNumber=AD584KNZ, Ref Out TC (ppm/C)=15, Vout="2.5V, 5V, 7.5V, 10V"
U4: Base Part Number=4584, Current - Output High, Low="8.8mA, 8.8mA", Manufacturer="ON Semiconductor", Operating Temperature="-55°C ~ 125°C", Package / Case="14-TSSOP (0.173\", 4.40mm Width)", Supplier Device Package=14-TSSOP, Supplier Part Number 1=MC14584BDTR2GOSCT-ND, Voltage - Supply="3 V ~ 18 V", Category="Integrated Circuits (ICs)", ComponentLink1Description=http://www.onsemi.com/pub/Collateral/MC14584B-D.PDF, ComponentLink1URL=http://www.onsemi.com/pub/Collateral/MC14584B-D.PDF, Features="Schmitt Trigger", Logic Level - High="3.4 V ~ 10.5 V", Logic Level - Low="1.6 V ~ 4.6 V", Logic Type=Inverter, Manufacturer Part Number=MC14584BDTR2G, Max Propagation Delay @ V, Max CL="80ns @ 15V, 50pF", Mounting Type="Surface Mount", Number of Inputs=6, Packaging="Cut Tape (CT)", Part Status=Active, Pricing 1="1=0.5, 10=0.43, 100=0.3213, 500=0.25242, 1000=0.19506 (USD)", RoHS="RoHS Compliant", Stock 1=5429, Supplier 1=Digi-Key
U6: library part CMP-0272-00241-3, "0.03 uV/degC, 6 uV Vos, Low Noise, Rail-to-Rail Output, Zero-Drift Operational Amplifier, 4 to 36 V, -40 to 105 degC, 8-pin SOIC (D8), Green (RoHS & no Sb/Br)", Current - Output / Channel=18mA, Current - Supply=415µA, Manufacturer="Texas Instruments", Operating Temperature="-40°C ~ 105°C", Package / Case="8-SOIC (0.154\", 3.90mm Width)", Supplier Device Package=8-SOIC, Supplier Part Number 1=296-29454-6-ND, Voltage - Supply, Single/Dual (±)="4 V ~ 36 V, ±2 V ~ 18 V", -3db Bandwidth=-, Amplifier Type=Zero-Drift, Category="Integrated Circuits (ICs)", ComponentLink1Description=http://www.ti.com/lit/ds/symlink/opa2188.pdf, ComponentLink1URL=http://www.ti.com/lit/ds/symlink/opa2188.pdf, Manufacturer Part Number=OPA2188AIDR, Mounting Type="Surface Mount", Number of Circuits=2, Output Type=Rail-to-Rail, Packaging=Digi-Reel®, Part Status=Active, Pricing 1="1=3.44, 10=3.089, 100=2.5307, 500=2.15434, 1000=1.81692 (USD)", RoHS="RoHS Compliant", Slew Rate="0.8 V/µs", Stock 1=8272, Supplier 1=Digi-Key
U9: "IC VREF SERIES 4.096V SOT23", Current - Supply=350µA, Manufacturer="Maxim Integrated", Operating Temperature="-40°C ~ 125°C (TA)", Package / Case=SOT-23-6, Supplier Part Number 1=MAX6070AAUT41+TCT-ND, Temperature Coefficient=6ppm/°C, Tolerance=±0.04%, Voltage - Input="4.3 V ~ 5.5 V", Voltage - Output (Min/Fixed)=4.096V, Category="Integrated Circuits (ICs)", ComponentLink1Description=https://datasheets.maximintegrated.com/en/ds/MAX6070-MAX6071.pdf, ComponentLink1URL=https://datasheets.maximintegrated.com/en/ds/MAX6070-MAX6071.pdf, Manufacturer Part Number=MAX6070AAUT41+T, Mounting Type="Surface Mount", Noise - 0.1Hz to 10Hz=9.6µVp-p, Noise - 10Hz to 10kHz=9µVrms, Output Type=Fixed, Packaging="Cut Tape (CT)", Part Status=Active, Pricing 1="1=3.41, 10=3.213, 25=2.5704, 50=2.4418, 100=2.2491, 250=2.13344, 500=2.05634 (USD)", Reference Type=Series, RoHS="RoHS Compliant", Stock 1=2623, Supplier 1=Digi-Key, Supplier Device Package=SOT-23-6
U11: library part CMP-0793-00109-1, "Low Capacitance, Low Charge Injection, +/-15 V / +12 V, 4:1 iCMOS Multiplexer, 120 Ohm Ron, 14-pin SOP (RU-14), Reel", Manufacturer="Analog Devices", Bandwidth (Hz)="800M, 550M", Code_JEDEC=MO-153AB-1, ComponentLink1Description="Manufacturer URL", ComponentLink1URL=http://www.analog.com/en/index.html, ComponentLink2Description=Datasheet, ComponentLink2URL=http://www.analog.com/static/imported-files/data_sheets/ADG1204.pdf, ComponentLink3Description="Package Specification", ComponentLink3URL=http://www.analog.com/static/imported-files/packages/36057385283879153717235186773RU14.pdf, DatasheetVersion="Rev. B", Max Analog Signal Range="Vss to Vdd", Mounting Technology="Surface Mount", PackageDescription="14-Pin Thin Shrink Small Outline Package, Body 5 x 4.4 mm, Pitch 0.65 mm", PackageReference=RU-14, PackageVersion=Aug-02, Packing=Reel, PartNumber=ADG1204YRUZ-REEL7, Ron (ohms)=120, t transition (s)=120n
U12: library part CMP-0249-00017-1, "16-Bit, +5V, 200ksps ADC with 10uA Shutdown, 10-Pin uMAX, -40°C to +85°C, Pb-Free, Tape and Reel", Code_JEDEC=MO-187-BA, ComponentLink1Description="Manufacturer URL", ComponentLink1URL=http://www.maxim-ic.com, ComponentLink2Description=Datasheet, ComponentLink2URL=http://datasheets.maxim-ic.com/en/ds/MAX11100.pdf, ComponentLink3Description="Package Specification", ComponentLink3URL=http://pdfserv.maxim-ic.com/package_dwgs/21-0061.PDF, DatasheetVersion="Rev 1, Jan-2012", PackageDescription="10-Pin Micro-MAX Thin Shrink Small Outline (uSOP), 3 x 3 x 0.85 mm Body, 0.5 mm Pitch, Pb-Free", PackageReference=U10+2, PackageVersion="revL, 2008"

## Free pads (board coordinates)
  round 196.85 hole 118.11: ""(150.11,150.11) ""(150.11,2500.11) ""(2500.11,150.11) ""(2500.11,2500.11)

## Via types
v1: diameter 40, hole 20, Top Layer to Bottom Layer, 134 vias
v2: diameter 39.37, hole 19.68, Top Layer to Bottom Layer, 19 vias
v3: diameter 50, hole 28, Top Layer to Bottom Layer, 6 vias

## Nets (pads, with @x,y where several pads share a name; then routed paths per layer and width w, separated by ;. In a path a pad name is that pad's centre, name@x,y a point inside that pad or via, vN(x,y) a via of type N, cw(c..) or ccw(c..) an arc to the next point about the centre after c; other vN are vias at no path point)
+3.3: C25.2 P3.6 U12.3 | length 165.4
  Top Layer w10: U12.3 1910.37,886.22 2001.47,886.22 v2(2005.36,890.11) 2005.36,861.36 C25.2@2033.61,833.11
+5: C3.1 C23.2 C24.2 C26.2 P2.4 P3.4 P4.6 R2.2 U2.5 U9.3 U9.4 U10.5 U11.2 U11.12 U12.7 U13.5 | length 1027.5
  Top Layer w10: v2(1099.11,1053.11) 1153.65,1053.11 R2.2 ; v2(1316.11,1392.07) 1317.05,1391.13 U2.5@1317.05,1338.6 ; U9.3 U9.4 1623.32,837.99 1691.24,905.91 1793.05,905.91 v2(1813.25,926.11) v2@1822.57,935.43 ; C26.2@1650,1266.93 1650.71,1267.64 U13.5 1714.01,1267.85 1714.01,1324.9 v2(1713.8,1325.11) ; v2(1903.01,1337.47) v2@1911.48,1337.47 ; U10.5@1925.36,1265.32 1924.87,1265.8 1924.87,1324.08 v2@1911.48,1337.47 ; C23.2@1964.61,1340.11 1949.07,1324.57 1936.16,1337.47 v2@1911.48,1337.47 ; v2@2016.96,1038.29 2069.13,1038.29 U11.2 ; U11.12 2292.79,1011.48 2348.74,1011.48 v2(2350.11,1010.11)
  Bottom Layer w10: v2(1316.11,1392.07) 1373.66,1392.07 C3.1 ; v2(1813.25,926.11) 1813.25,967.25 C24.2@1825.36,979.36
  other v2: 2015.49,1038.78
+5R: U5.12 U5.17 U8.1 U8.4 | length 854.6
  Top Layer w10: U5.17 461.65,3062.95 443.86,3045.16 443.86,2952.8 461.65,2935 502.99,2935 557.34,2880.65 557.34,2547.31 565.13,2539.51 581.71,2539.51 589.5,2531.72 612.35,2531.72 679.36,2464.71 U8.4 690.98,2463.91 761.31,2463.91 v2(762.11,2463.11)
+9: C2.2 C12.2 P4.10 U1.16 U5.16 | length 3179.6
  Top Layer w10: v3(49,2883) 49,2872.18 40.78,2863.96 40.78,1634.22 92,1583 183,1583 P4.10 ; U5.16 v3(544.11,3037.36) ; U1.16 922.63,1372.91 900,1395.54 v3(900,1591.49) 963.29,1591.49 C2.2@964.68,1590.11
  Bottom Layer w10: v3(49,2883) 203.36,3037.36 v3(544.11,3037.36) 544.11,2978.61 C12.2@545.11,2977.61 ; P4.10 308.73,1591.49 v3(900,1591.49)
+12: C16.2 C17.2 C20.1 P4.5 U6.8 U7.8 U8.5 | length 2973.7
  Top Layer w10: C17.2@689.86,2606.11 689.86,2539.84 U8.5 777.49,2539.51 866.11,2450.89 U7.8 951.68,2327.11 C20.1 ; U6.8 1179.24,2876.11 v2(1268.11,2876.11)
  Bottom Layer w10: P4.5 197,1897 859.5,1897 1265.61,2303.11 ; U7.8 1241.61,2327.11 1265.61,2303.11 ; C16.2@1169.57,2864.57 1169.57,2868.33 C16.2@1175.57,2874.34 ; C16.2@1175.58,2874.34 1176.08,2874.84 v2@1266.84,2874.84 ; v2(1268.11,2876.11) v2@1266.84,2874.84 ; 1265.61,2303.11 1265.61,2873.61 v2@1266.84,2874.84
-5: C4.1 C5.1 C13.2 P2.3 P4.7 U1.5 U2.2 U5.5 | length 5395.2
  Top Layer w10: C13.2@142.11,3031.61 147.86,3037.36 217.36,3037.36 ; U5.5 217.36,3037.36 ; v2(270.11,2790.11) 203,2857.22 203,3023 217.36,3037.36 ; C4.1 616.88,1372.91 685,1372.91 ; v3(672,1662) 672,1385.91 685,1372.91 ; U1.5 685,1372.91 ; C5.1 1355.39,1127.33 U2.2 1355.39,1223.32 1369.09,1237.02 1369.09,1239.51 1474.69,1345.11 v3(1485.11,1345.11) ; v2(1447.62,3185.11) 1535.11,3097.62 P2.3
  Bottom Layer w10: v2(1447.62,3185.11) 1298.37,3185.11 814.78,2701.52 358.7,2701.52 v2(270.11,2790.11) 270.11,2373.21 93,2196.1 93,1807.22 P4.7 203.22,1697 637,1697 v3(672,1662) 1227.41,1662 1485.11,1404.3 v3(1485.11,1345.11)
"ADC REF": C22.2 U9.5 U9.6 U12.6 | length 269
  Top Layer w10: U9.5 U9.6 ; 1576.34,874.8 1626.5,874.8 1677.21,925.51 1687.11,925.51 ; C22.2@1687.11,961.61 1687.11,925.51 ; U12.6 1687.11,925.51
Analog_Mux_Out: U11.6 U12.5 | length 163.4
  Top Layer w10: U12.5 2040.96,925.51 2050.88,935.43 U11.6
BEAM: P2.1 TP2.1 U1.14 | length 2193.2
  Top Layer w10: U1.14 884.28,1321.72 843,1363 843,1745 1617.02,2519.02 1617.02,2963.21 P2.1 1586.11,2996.11 1693.11,2996.11 TP2.1
"Beam Sync Demod Out": C6.2 R2.1 R4.1 R23.2 TP1.1 | length 629
  Top Layer w10: C6.2 1155.11,928.61 R2.1 R4.1 ; TP1.1 1275.11,958.5 1245.97,987.65 R4.1 ; R23.2@1568.95,1022.05 1561.37,1022.05 1538.7,999.38 1248.84,999.38 R4.1
Beam_mod: R3.2 TP3.1 U1.13 | length 291.3
  Top Layer w10: U1.13 1032.43,1296.13 R3.2@1033.46,1295.11 ; R3.2 1050.38,1312.84 1050.38,1381.38 TP3.1
Beam_Reduced: R23.1 R24.2 U11.5 | length 611.7
  Top Layer w10: R24.2 1571.11,1089.86 1583.59,1077.38 1747.62,1077.38 1863.98,961.02 U11.5
D2: C11.2 R11.1 U4.5 | length 167.7
  Bottom Layer w10: U4.5 509.29,1203.46 R11.1 589.14,1204.65 C11.2
GND: C2.1 C3.2 C4.2 C5.2 C6.1 C8.1 C9.1 C10.2 C11.1 C12.1 C13.1 C16.1 C17.1 C19.1 C20.2 C21.2 C22.1 C23.1 C24.1 C25.1 C26.1 P1.1 P2.2 P2.9 P3.1 P4.9 R7.1 R9.2 R16.2 R21.1 R22.1 R24.1 R26.1 R28.1 TP8.1 U1.12 U3.4 U4.7 U5.2 U5.6 U5.14 U5.19 U6.4 U7.4 U8.2 U9.2 U10.2 U11.3 U11.13 U12.2 U12.4 U12.8 U13.2 | length 254.7
  Top Layer w10: U12.8 1831.39,886.14 ; U12.2 1851.08,866.46 1831.39,886.14 ; U12.4 1851.08,905.83 1831.39,886.14
  other v1: 574.8,181.1 771.65,181.1 968.5,181.1 1165.35,181.1 1362.2,181.1 1559.06,181.1 1755.91,181.1 1952.76,181.1 2149.61,181.1 2346.46,181.1 279.53,377.95 476.38,377.95 673.23,377.95 870.08,377.95 1066.93,377.95 1263.78,377.95 1460.63,377.95 1657.48,377.95 1854.33,377.95 2051.18,377.95 181.1,574.8 574.8,574.8 968.5,574.8 1165.35,574.8 1362.2,574.8 1559.06,574.8 1755.91,574.8 2149.61,574.8 279.53,771.65 476.38,771.65 870.08,771.65 1066.93,771.65 1263.78,771.65 1460.63,771.65 1657.48,771.65 2248.03,771.65 181.1,968.5 377.95,968.5 574.8,968.5 968.5,968.5 1559.06,968.5 1066.93,1165.35 1657.48,1165.35 1854.33,1165.35 2051.18,1165.35 2444.88,1165.35 181.1,1362.2 377.95,1362.2 1559.06,1362.2 1755.91,1362.2 2149.61,1362.2 2346.46,1362.2 279.53,1559.06 1263.78,1559.06 1460.63,1559.06 1657.48,1559.06 2051.18,1559.06 377.95,1755.91 574.8,1755.91 771.65,1755.91 968.5,1755.91 1165.35,1755.91 1362.2,1755.91 1559.06,1755.91 1952.76,1755.91 2346.46,1755.91 476.38,1952.76 673.23,1952.76 1263.78,1952.76 1657.48,1952.76 2444.88,1952.76 377.95,2149.61 771.65,2149.61 1165.35,2149.61 1559.06,2149.61 1755.91,2149.61 1952.76,2149.61 2346.46,2149.61 476.38,2346.46 673.23,2346.46 1657.48,2346.46 1854.33,2346.46 2444.88,2346.46 377.95,2543.31 968.5,2543.31 1165.35,2543.31 1559.06,2543.31 1755.91,2543.31 2149.61,2543.31 2346.46,2543.31 476.38,2740.16 1066.93,2740.16 1460.63,2740.16 1657.48,2740.16 2051.18,2740.16 2444.88,2740.16 968.5,2937.01 1165.35,2937.01 1755.91,2937.01 1952.76,2937.01 2149.61,2937.01 2346.46,2937.01 1657.48,3133.86 2051.18,3133.86 181.1,3330.71 377.95,3330.71 574.8,3330.71 968.5,3330.71 1165.35,3330.71 1362.2,3330.71 1559.06,3330.71 1755.91,3330.71 2149.61,3330.71 279.53,3527.56 476.38,3527.56 1066.93,3527.56 1263.78,3527.56 1460.63,3527.56 1657.48,3527.56 1854.33,3527.56 2051.18,3527.56 2248.03,3527.56 2444.88,3527.56 181.1,3724.41 377.95,3724.41 574.8,3724.41 968.5,3724.41 1165.35,3724.41 1362.2,3724.41 1559.06,3724.41 1755.91,3724.41 1952.76,3724.41 2149.61,3724.41 2346.46,3724.41
  other v3: 797.11,3023.11
NetC1_1: C1.1 R1.2 R3.1 U2.4 | length 294.9
  Top Layer w10: R3.1 1237.61,1301.11 C1.1 ; C1.1@1242.43,1289.27 1247.28,1294.11 1369.09,1294.11 U2.4@1392.79,1317.81
NetC1_2: C1.2 R1.1 R4.2 U2.1 | length 346.7
  Top Layer w10: R1.1 1170.08,1237.61 C1.2 1238.11,1055.57 R4.2 ; C1.2@1242.43,1251.87 1250.19,1244.11 1250.19,1233.41 1259.68,1223.91 1315.98,1223.91 U2.1@1316.68,1224.62
NetC7_1: C7.1 U3.7 | length 75.5
  Bottom Layer w10: U3.7 1822.94,2018.37 1847.56,2018.37 1863.9,2034.71 1863.9,2042.58 C7.1@1869.13,2047.82
NetC7_2: C7.2 U3.6 | length 72.1
  Bottom Layer w10: U3.6 1814.94,2108.76 1847.56,2108.76 1863.9,2092.43 1863.9,2084.55 C7.2@1869.13,2079.32
NetC14_1: C14.1 R14.2 R15.2 R22.2 | length 198.6
  Top Layer w10: R22.2 766.11,3112.61 766.61,3112.11 832.64,3112.11 834.65,3114.11 R15.2
NetC14_2: C14.2 R12.1 R13.2 | length 128.6
  Top Layer w10: R13.2 648.11,3110.57 R12.1 701.61,3110.11 C14.2@703.61,3112.11
NetC15_1: C15.1 R18.2 R20.2 R21.2 | length 201.3
  Top Layer w10: R21.2 767.61,2881.07 C15.1 829.65,2941.11 R20.2@832.65,2944.11 ; R18.2 R20.2
NetC15_2: C15.2 R17.1 R19.2 | length 129.2
  Top Layer w10: R17.1@647.11,2868.57 647.57,2869.04 647.57,2940.11 703.61,2940.11 C15.2
NetC18_1: C18.1 U7.7 | length 105.5
  Top Layer w10: U7.7 872.91,2220.31 949.41,2220.31 C18.1@963.11,2206.61
NetC18_2: C18.2 U7.6 | length 103.8
  Top Layer w10: U7.6 868.91,2129.91 949.41,2129.91 C18.2@963.11,2143.61
NetC19_2: C19.2 U7.1 U7.2 U8.3 | length 347.4
  Top Layer w10: C19.2@473.11,2238.61 484.61,2227.11 U7.2 U7.1 574.04,2335.04 574.04,2456.91 U8.3@590.64,2456.91
NetC21_1: C21.1 U9.1 | length 93.2
  Top Layer w10: C21.1@1355.11,914.61 1356.92,912.8 U9.1
NetP1_2: P1.2 R9.1 U3.3 | length 1390.9
  Top Layer w10: P1.2@1850.11,3391.11 1852.11,3389.11 1852.11,2629.49 R9.1 2058.34,2165.36 U3.3
NetP3_3: P3.3 U11.14 | length 417.1
  Top Layer w10: U11.14 2357.61,1063.39 2390.77,1030.23 2390.77,809.45 P3.3
NetP3_5: P3.5 U11.1 | length 581.3
  Top Layer w10: U11.1 2087.34,1063.39 2264.54,886.18 2264.54,835.68 P3.5
NetP3_7: P3.7 U12.1 | length 662.7
  Top Layer w10: U12.1 1933.76,846.77 2230.42,550.11 P3.7
NetP3_9: P3.9 U12.10 | length 863.6
  Top Layer w10: U12.10 1774.31,846.77 2170.97,450.11 P3.9
NetP3_10: P3.10 U12.9 | length 1181.6
  Top Layer w10: U12.9 1750.76,866.38 1710.38,866.38 1697,853 1697,831 2155,373 2473,373 P3.10 P3.10@2568.11,468.11
NetR7_2: R7.2 U2.3 | length 102.5
  Top Layer w10: U2.3 1392.79,1152.04 1416.25,1128.57 R7.2
NetR10_1: R10.1 U4.1 | length 164.5
  Bottom Layer w10: R10.1 378.38,1257.38 378.38,1168.5 406.93,1139.95 U4.1
NetR12_2: R12.2 U5.18 | length 85.6
  Top Layer w10: U5.18 566.46,3088.54 R12.2@567.48,3089.57
NetR13_1: R13.1 R16.1 | length 421.9
  Top Layer w10: R13.1@645.11,3248.57 v2(645.11,3305.11)
  Bottom Layer w10: v2(645.11,3305.11) 644.61,3305.61 644.61,3669.61 R16.1@645.11,3670.11
NetR14_1: R14.1 R18.1 U6.5 | length 432.6
  Top Layer w10: R18.1@890.79,2854.57 890.79,2855.7 911.31,2876.22 U6.5 ; R14.1@890.79,3094.57 890.79,3085.43 v2(921.11,3055.11) ; U6.5@1030.11,2876.22 1029.62,2876.71 1029.62,2959.62 v2(1030.11,2960.11)
  Bottom Layer w10: v2(921.11,3055.11) 928.11,3055.11 1023.11,2960.11 v2(1030.11,2960.11)
NetR15_1: R15.1 R20.1 U6.3 | length 481
  Top Layer w10: R20.1@890.79,2925.79 911.31,2946.31 911.31,2972.31 972.11,3033.11 ; R15.1@903.57,3190.57 972.11,3122.03 972.11,3033.11 ; U6.3 1079.13,3049.13 1055,3025 980.22,3025 972.11,3033.11
NetR16_3: R16.3 R17.2 | length 1087.5
  Top Layer w10: R17.2 659.97,2798.65 671.7,2786.91 671.7,2750.47 682.11,2740.06 v2(682.11,2732.11)
  Bottom Layer w10: v2(682.11,2732.11) 844.11,2894.11 844.11,3665.11 R16.3@846.11,3667.11
NetR19_1: R19.1 U5.13 | length 85.6
  Top Layer w10: U5.13 566.46,2960.59 R19.1@567.48,2959.57
NetR25_1: R25.1 R26.2 U10.3 | length 649.8
  Top Layer w10: U10.3 1999.19,1160.76 2097,1258.57 2097,1554.39 2197.48,1654.88 R25.1@2203.88,1654.88 ; R25.1 2205.11,1601.57 R26.2
NetR27_1: R27.1 R28.2 U13.3 | length 619.1
  Top Layer w10: R28.2 R27.1 1791.97,1653.65 1840,1605.61 1840,1213.3 1789.02,1162.32 U13.3
PLATE_N: P2.6 TP10.1 U6.6 U6.7 | length 584.5
  Top Layer w10: U6.6 U6.7
  Top Layer w15: U6.7 1129.13,2862.44 1181.46,2810.11 1325.11,2810.11 ; TP10.1@1324.11,2742.11 1325.11,2743.11 1325.11,2810.11 ; P2.6 1485.11,2913.11 1382.11,2810.11 1325.11,2810.11
PLATE_P: P2.5 TP11.1 U6.1 U6.2 | length 625.1
  Top Layer w10: U6.2 U6.1
  Top Layer w15: U6.2 1129.13,3096.69 1177.55,3145.11 1317.11,3145.11 ; TP11.1 1317.11,3229.11 1317.11,3145.11 ; P2.5 1485.11,3057.11 1397.11,3145.11 1317.11,3145.11
PWM1A: P2.10 P3.2 TP12.1 | length 2850.7
  Top Layer w10: TP12.1 2511.11,893.22 2550.11,854.22 P3.2
  Bottom Layer w10: P2.10 1385.11,2018.37 2550.11,853.37 P3.2
PWM1A_DELAY: R8.1 TP6.1 U4.6 | length 547.3
  Top Layer w10: v2(634.92,1024.11) R8.1
  Bottom Layer w10: U4.6 534.88,1100.46 540.71,1094.64 540.71,1072.29 583.27,1029.73 629.3,1029.73 v2(634.92,1024.11) TP6.1
PWM2A: C8.2 P4.2 R5.1 R10.2 R11.2 TP4.1 U4.2 | length 1760.4
  Top Layer w10: P4.2 505.11,1795.11 505.11,1350.11 507.83,1347.39 507.83,1341.39 680.52,1168.7 747.91,1168.7 753.79,1162.83 R5.1@753.79,1151.11
  Bottom Layer w10: C8.2 257.76,1083.26 TP4.1 338.19,1005.86 431.04,1098.72 431.04,1119.78 U4.2 432.52,1268.06 R10.2 505.65,1269.11 R11.2 505.11,1274.57 v2(505.11,1344.11)
PWM2B: P4.8 R6.1 TP5.1 U5.11 U5.20 | length 2888.6
  Top Layer w10: U5.11 481.62,2910.11 396.11,2910.11 ; U5.20 461.65,3139.72 396.11,3074.18 396.11,2910.11 ; TP5.1 759.65,774.57 759.65,850.11 ; R6.1@760.11,917.11 759.65,916.65 759.65,850.11 ; 396.11,2910.11 314,2828 314,2453 200,2339 200,1800.22 P4.8 460,1540.22 460,1135.61 745.5,850.11 759.65,850.11
Sync_clk: R5.2 R6.2 R8.2 U1.11 | length 380
  Top Layer w10: R8.2@826.57,1037.11 826.57,1156.97 913.84,1244.23 942.58,1244.23 U1.11 ; R6.2 R8.2
ZH: C9.2 P2.8 P3.8 R25.2 TP7.1 U3.1 | length 3998.1
  Top Layer w10: R25.2 v2(2205.11,1830.11)
  Bottom Layer w10: P2.8 1435.11,2902.11 1532.11,2805.11 2250.11,2805.11 ; C9.2@2048.13,1910.82 2112.88,1910.82 U3.1 2187.97,1835.73 2202.49,1835.73 v2@2205.11,1833.11 ; v2(2205.11,1830.11) v2@2205.11,1833.11 ; TP7.1 2250.11,2805.11 ; P3.8 2602,602 2602,1436.22 v2@2205.11,1833.11 ; v2@2205.11,1833.11 2205.11,2299.08 2250.11,2344.08 2250.11,2805.11
ZH_Reduced: U11.4 U13.1 U13.4 | length 600.1
  Top Layer w10: U13.4 1789.02,1256.81 1722.01,1189.8 1722.01,1159.29 U13.1 1722.01,1143.7 1714,1143.7 1714,1121 1726,1109 1892,1109 2014.39,986.61 U11.4
ZP: C10.1 P2.7 R27.2 TP9.1 U3.8 | length 3259.4
  Top Layer w10: R27.2 1791.97,1720.57 1803.7,1732.31 1803.7,1885.86 1814.13,1896.29 U3.8 1873.7,1850 2147,1850 2289,1992 2289,2968 2456.41,3135.41 TP9.1@2456.41,3150.11
  Bottom Layer w10: P2.7 1435.11,3047.11 1613,3225 2386.22,3225 2456.41,3154.81 TP9.1@2456.41,3150.11 ; U3.8 1872.04,1909.57 1889.68,1927.21 C10.1@1889.68,1930.11
ZP_Reduced: U10.1 U10.4 U11.11 | length 590.2
  Top Layer w10: U10.4 1999.19,1255.25 1932.18,1188.24 1932.18,1157.73 U10.1 1924.39,1139.11 1938.09,1125.4 1938.09,1122.92 1979.82,1081.18 2179.78,1081.18 2274.35,986.61 U11.11
pads on no net: P4.1 P4.3 P4.4 U1.1 U1.2 U1.3 U1.4 U1.6 U1.7 U1.8 U1.9 U1.10 U1.15 U1.17 U1.18 U1.19 U1.20 U3.2 U3.5 U4.3 U4.4 U4.8 U4.9 U4.10 U4.11 U4.12 U4.13 U4.14 U5.1 U5.3 U5.4 U5.7 U5.8 U5.9 U5.10 U5.15 U7.3 U7.5 U11.7 U11.8 U11.9 U11.10

## Polygon pours and split planes (outlines as drawn)
GND on Bottom Layer "Bottom_GND" (solid, pour order 2): 0.11,3852.11 0.11,0.11 2637.8,0.11 2637.79,3852.11
GND on Top Layer "Top_GND" (solid, pour order 0): 0.11,3852.11 0.11,0.11 2637.79,0.11 2637.8,3852.11
+5 on +5V (split plane): 2617.7,3832.01 2617.7,20.1 20.1,20.1 20.1,3832.01
+3.3 on GND (split plane): 2617.7,3832.01 2617.7,20.1 20.1,20.1 20.1,3832.01

## Silkscreen, mask and mechanical layers (free items; w line width, h text height)
Top Overlay:
  circle w3.94: c429.62,610.33 r183.58
  circle w10: c429.62,610.33 r196.85
  rectangle: 1810.11,2520.11 2165.11,2870.11
  lines w5: 369.62,703.33 399.62,673.33 429.62,693.33 389.62,643.33 449.62,673.33 409.62,623.33 469.62,653.33 429.62,603.33 489.62,633.33 449.62,583.33 509.62,613.33 489.62,583.33 519.62,553.33
  lines w10: 349.62,708.33 389.62,708.33 ; 369.62,703.33 369.62,553.33 519.62,553.33 ; 524.62,533.33 524.62,573.33
  text "ZLS" at 389.62,490.33 h47.24
  text "LM-002" at 364.1,246.62 h29.53
  text "REV B" at 364.1,171.62 h29.53
  text "ZLS Corp" at 364.1,96.62 h29.53
Bottom Overlay:
  text "ZH Adjust Pot" at 2075,3775 h29.53
  text "Offset / Adjust" at 799.11,3575.11 h20
  text "Plate P" at 1249.11,3205.11 h29.53 r90
  text "ZH" at 2273.11,3088.11 h29.53 r90
  text "ZP" at 2474.11,3087.11 h29.53 r90
  text "GND" at 2368.11,3085.11 h29.53 r90
  text "Plate N" at 1244.11,2586.11 h29.53 r90
  text "Beam Mod Out" at 1198.11,1436.11 h20 r270
  text "Synch Demod Out" at 1202.11,646.11 h20 r270
Mechanical 1:
  text "Top faces inward to center of meter" at 1569.11,3513.11 h20

## Dimensions
2637.8,0 to 0,0 on Mechanical 1
0,0 to 0,3852.11 on Mechanical 1
2500.11,2500.11 to 2500.11,150.11 on Mechanical 1
2500.11,150.11 to 150.11,150.11 on Mechanical 1
150.11,150.11 to 0.11,0.11 on Mechanical 1
0,0 to 150.11,150.11 on Mechanical 1
2550.11,450.11 to 2500.11,150.11 on Mechanical 1

## Text inside footprints (layer, text, board x,y; h text height)
P2: Mechanical 1 "J1" at 1504.68,2990.11 h30 r180